# EAGLE board USB IMU Board (EAGLE 7.6.0)
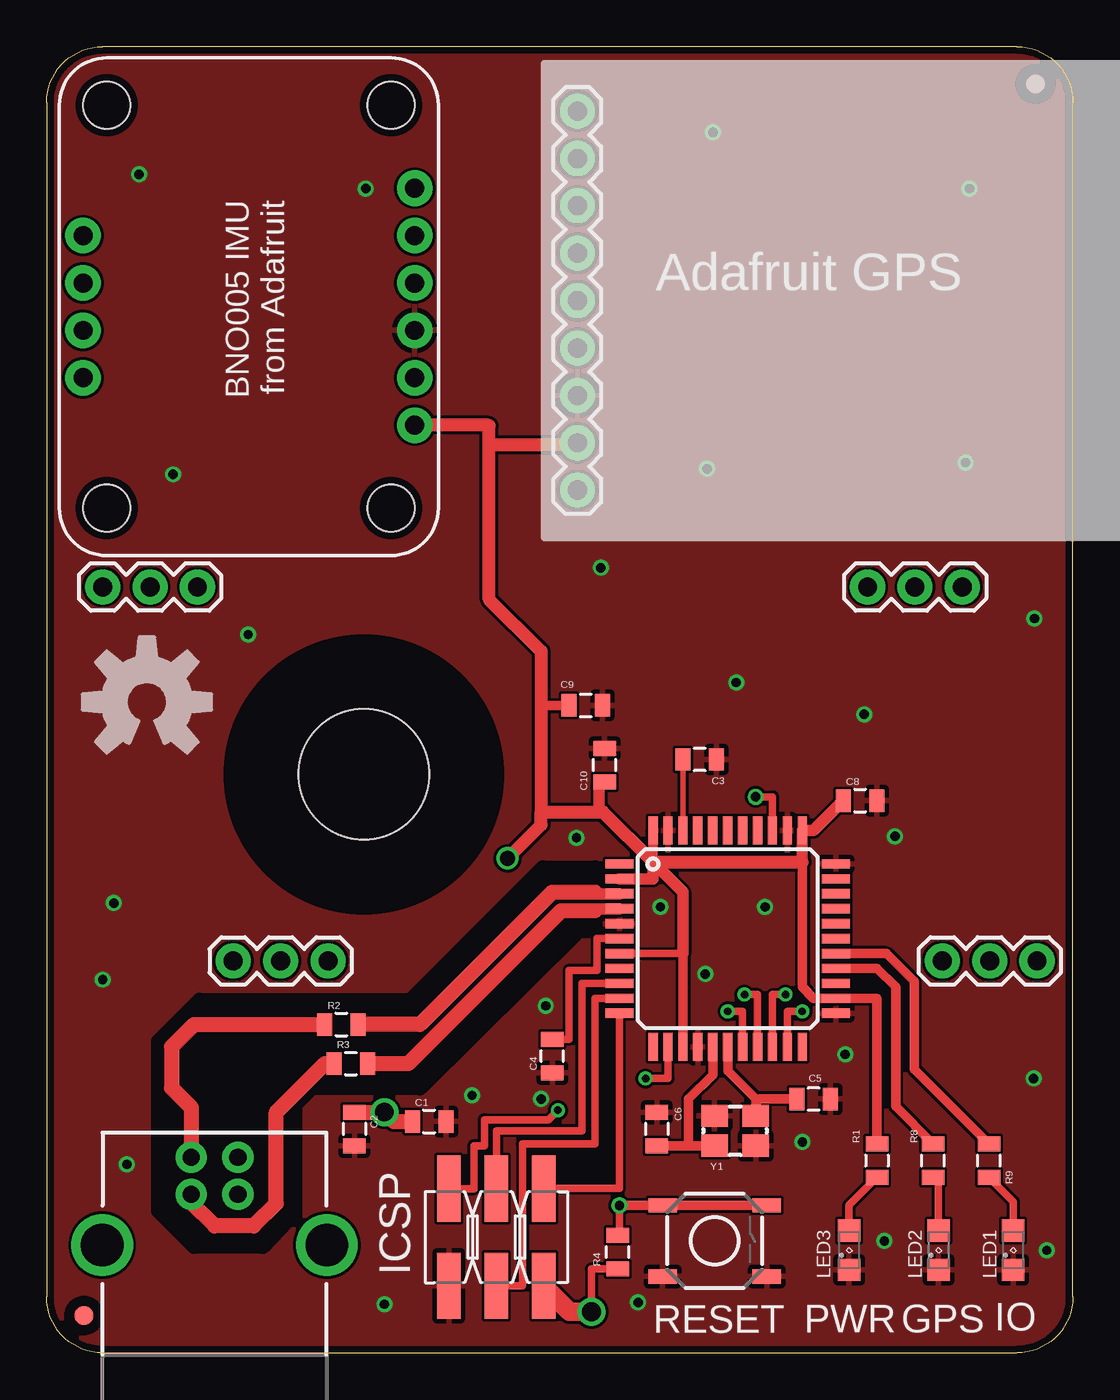
[diagram p0: board, top side]
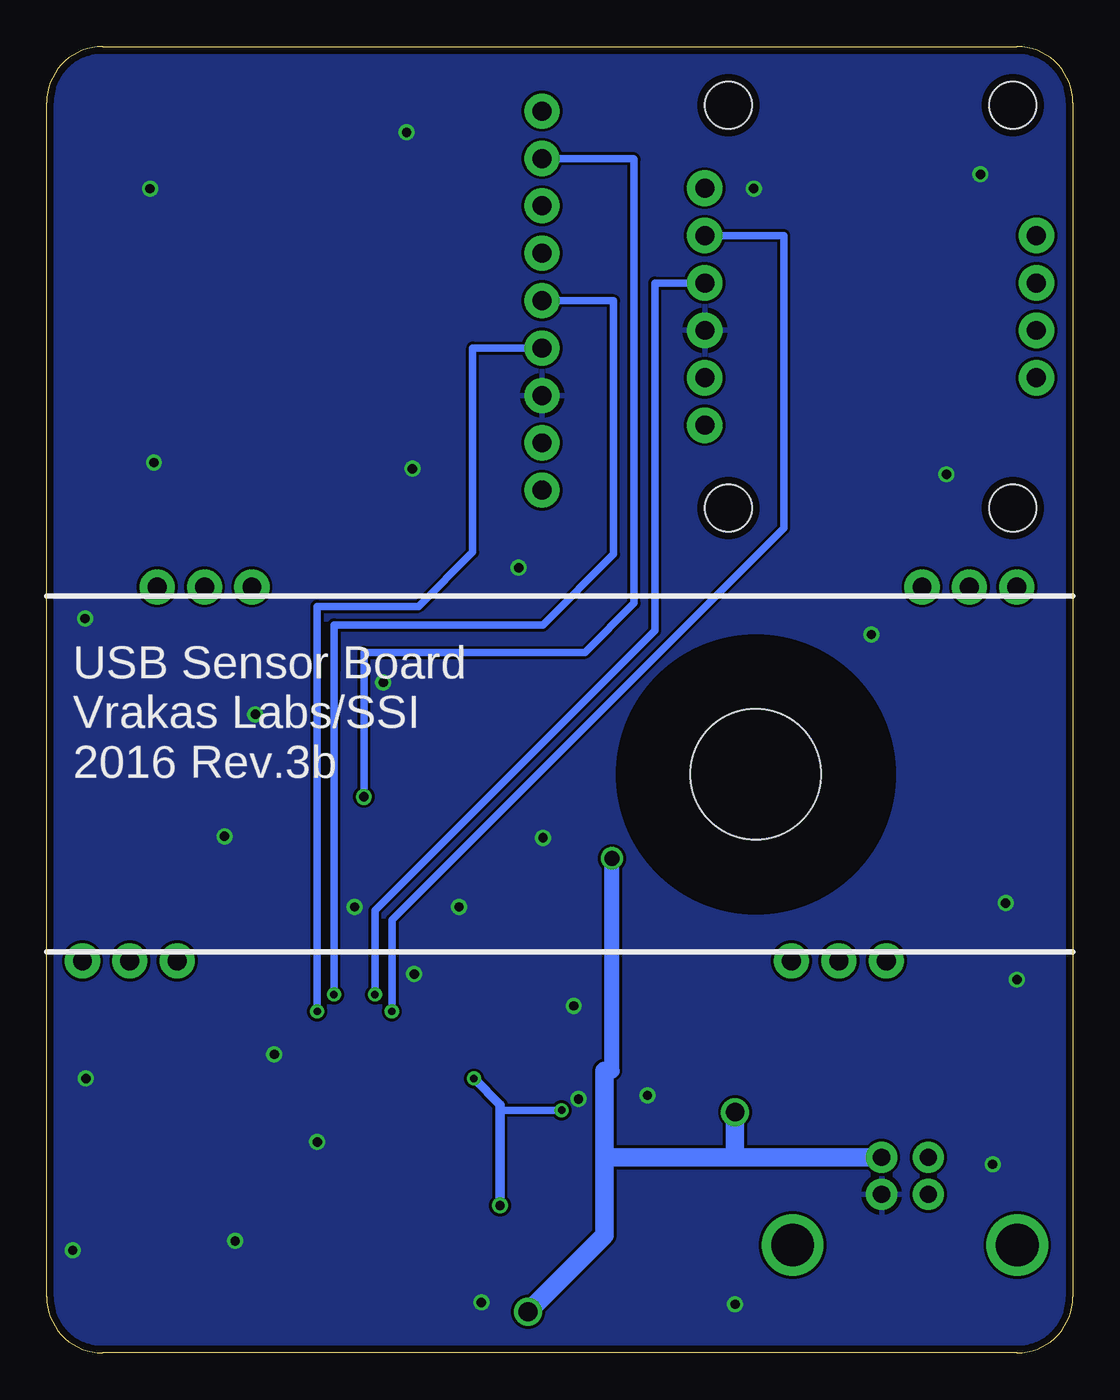
[diagram p1: board, bottom side, seen from below]

Size 55 x 70 mm. Coordinates in mm from the lower left corner, seen from the top.
Outline: 3,0 52,0 arc90 55,3 55,67 arc90 52,70 3,70 arc90 0,67 0,3 arc90 3,0
Copper layers (1*16): Top 0.0356mm / dielectric 1.5011mm / Bottom 0.0356mm
Design rules "LaenPCBOrder *": minimum track width 6mil, minimum drill 13mil, track to track 6mil, track to pad 6mil, pad to pad 6mil, via to via 6mil, smd to smd 6mil, copper to edge 15mil, drill to drill 6mil, minimum pad ring 7mil, minimum via ring 7mil, stop-mask expansion 3mil, vias tented up to drill 5mm, thermal gap 10mil
Holes 7 mm at 17,31
tKeepout: area 10,24 to 24,38
bKeepout: area 10,24 to 24,38
tRestrict: area 10,24 to 24,38; area 6,5.7 to 29.4,26
bRestrict: area 10,24 to 24,38

## Footprints (pad centres in the part's own frame; a part is rotated, then mirrored left to right if it is on the bottom)
0805 = smd 0.8 x 1.2: 1 -0.9,0; 2 0.9,0
M2X3_SMD = smd 1.27 x 3.56: 1 -2.54,-2.605; 2 -2.54,2.605; 3 0,-2.605; 4 0,2.605; 5 2.54,-2.605; 6 2.54,2.605
1X09 = drill 1.016 pad 1.88: 1 0,0; 2 2.54,0; 3 5.08,0; 4 7.62,0; 5 10.16,0; 6 12.7,0; 7 15.24,0; 8 17.78,0; 9 20.32,0
USB-B-PTH = drill 0.914 pad 1.676: D+ 0,1.25; D- 1.981,1.25; GND 0,-1.25; VBUS 1.981,-1.25 | drill 2.286: S1 -2.718,-6.02; S2 -2.718,6.02
1X03 = drill 1.016 pad 1.88: 1 0,0; 2 2.54,0; 3 5.08,0
SML0805 = smd 1.2 x 1.2: A 1.05,0; C -1.05,0
TACTILE-SWITCH-SMD = smd 1.524 x 0.762: 1 -2.794,1.905; 2 2.794,1.905; 3 -2.794,-1.905; 4 2.794,-1.905
TQFP44 = smd 1.5 x 0.5: 1 -5.8,4; 2 -5.8,3.2; 3 -5.8,2.4; 4 -5.8,1.6; 5 -5.8,0.8; 6 -5.8,0; 7 -5.8,-0.8; 8 -5.8,-1.6; 9 -5.8,-2.4; 10 -5.8,-3.2; 11 -5.8,-4; 23 5.8,-4; 24 5.8,-3.2; 25 5.8,-2.4; 26 5.8,-1.6; 27 5.8,-0.8; 28 5.8,0; 29 5.8,0.8; 30 5.8,1.6; 31 5.8,2.4; 32 5.8,3.2; 33 5.8,4 | smd 0.5 x 1.5: 12 -4,-5.8; 13 -3.2,-5.8; 14 -2.4,-5.8; 15 -1.6,-5.8; 16 -0.8,-5.8; 17 0,-5.8; 18 0.8,-5.8; 19 1.6,-5.8; 20 2.4,-5.8; 21 3.2,-5.8; 22 4,-5.8; 34 4,5.8; 35 3.2,5.8; 36 2.4,5.8; 37 1.6,5.8; 38 0.8,5.8; 39 0,5.8; 40 -0.8,5.8; 41 -1.6,5.8; 42 -2.4,5.8; 43 -3.2,5.8; 44 -4,5.8
BNO055-BREAKOUT = drill 1.016 pad 1.905: 3VO 1.27,17.145; ADR 19.05,9.525; GND 1.27,14.605; INT 19.05,12.065; PS0 19.05,17.145; PS1 19.05,14.605; RST 1.27,6.985; SCL 1.27,9.525; SDA 1.27,12.065; VIN 1.27,19.685 | hole 2.54: 2.54,2.54; 17.78,2.54; 2.54,24.13; 17.78,24.13
FIDUCIAL_1MM = smd 1 x 1: 1 0,0
CRYSTAL-SMD-5X3 = smd 1.4 x 1.2: 1 -1.1,-0.8; 2 1.1,-0.8; 3 1.1,0.8; 4 -1.1,0.8

## Placement (x,y rotation side)
C1  1uF  [0805]  20.5,12.4 0 top
C2  100nF  [0805]  16.5,12 270 top
C3  100nF  [0805]  35,31.8 180 top
C4  1uF  [0805]  27.1,15.9 90 top
C5  12pF  [0805]  41.1,13.6 180 top
C6  12pF  [0805]  32.7,12 270 top
C8  100nF  [0805]  43.6,29.6 0 top
C9  1uF  [0805]  28.9,34.7 0 top
C10  100nF  [0805]  29.9,31.5 90 top
FRAME2  FRAME-LETTERNO_PACKAGE  [DUMMY]  0,0 0 top
ICSP  CON_HEADER_PRG_AVR_ICSP-SMD  [M2X3_SMD]  24.1,6.2 180 top
J1  Adafruit GPS  [1X09]  28.45,66.55 270 top
JP1  USB-B  [USB-B-PTH]  9,8.5 90 top
JP3  [1X03]  3,41.05 0 top
JP4  [1X03]  44,41.05 0 top
JP5  [1X03]  10,21 0 top
JP7  [1X03]  48,21 0 top
LED1  GR  [SML0805]  51.8,5.5 90 top
LED2  RD  [SML0805]  47.8,5.5 90 top
LED3  BL  [SML0805]  43,5.5 90 top
R1  330  [0805]  44.5,10.3 270 top
R2  22  [0805]  15.8,17.6 0 top
R3  22  [0805]  16.3,15.5 0 top
R4  10K  [0805]  30.6,5.4 90 top
R8  330  [0805]  47.5,10.3 90 top
R9  330  [0805]  50.5,10.3 90 top
RESET  RST  [TACTILE-SWITCH-SMD]  35.8,6 0 top
U$1  ATMEGA32U4TQFP-44  [TQFP44]  36.5,22.2 0 top
U$4  BNO055-IMU  [BNO055-BREAKOUT]  21,69.4 180 top
U$7  FIDUCIAL  [FIDUCIAL_1MM]  53,68 0 top
U$8  FIDUCIAL  [FIDUCIAL_1MM]  2,2 0 top
U$9  [OSHW-LOGO-L]  5.37,34.88 0 top
Y1  16Mhz  [CRYSTAL-SMD-5X3]  36.9,11.9 0 top

## Library data of the parts
C1-C6 C8-C10 R4 = SparkFun-Passives
FRAME2 = SparkFun-Aesthetics; DESIGNER: Tim Vrakas; VERSION: 2
ICSP = dp_devices
J1 JP3-JP5 JP7 = SparkFun-Connectors
JP1 = SparkFun-Connectors; PROD_ID: CONN-08278
LED1-LED3 = led
R1-R3 R8 R9 = SparkFun-Resistors
RESET = SparkFun-Electromechanical; PROD_ID: SWCH-08247
U$1 = SparkFun-DigitalIC
U$4 = NASA Parts Lib
U$7 U$8 = adafruit
U$9 = SparkFun-Aesthetics
Y1 = crystal_3225

## Nets
DIN_N [USB1]: R2.2 U$1.3
DIN_P [USB1]: R3.2 U$1.4
GND: C1.2 C2.2 C3.1 C4.1 C5.1 C6.1 C8.2 C9.2 C10.2 ICSP.6 J1.7 JP1.GND LED1.C LED2.C LED3.C RESET.3 RESET.4 U$1.5 U$1.15 U$1.23 U$1.33 U$1.35 U$1.43 U$4.GND Y1.2 Y1.4
GPS_EN: J1.2 U$1.36
LED1: R9.2 U$1.27
LED2: R8.2 U$1.26
MIGO: J1.5 U$1.20
MISO: ICSP.1 U$1.11
MOGI: J1.6 U$1.21
MOSI: ICSP.4 U$1.10
N$1: C5.2 U$1.17 Y1.3
N$2: C6.2 U$1.16 Y1.1
N$3: C3.2 U$1.42
N$4: LED3.A R1.2
N$9: C4.2 U$1.6
N$12: LED1.A R9.1
N$13: LED2.A R8.1
RST: ICSP.5 R4.2 RESET.1 RESET.2 U$1.13
SCK: ICSP.3 U$1.9
SCL: U$1.18 U$4.SCL
SDA: U$1.19 U$4.SDA
USB_N: JP1.D- R2.1
USB_P: JP1.D+ R3.1
VCC: C1.1 C2.1 C8.1 C9.1 C10.1 ICSP.2 J1.8 JP1.VBUS R1.1 R4.1 U$1.2 U$1.7 U$1.14 U$1.24 U$1.34 U$1.44 U$4.VIN

## Tracks (layer width: path | path; a pad name or v marks a point on that pad's centre or on a via)
DIN_N
  Top 0.61: 29.4,24.7 29.5,24.6 U$1.3
  Top 0.813: 29.4,24.7 27.1,24.7 20,17.6 R2.2
DIN_P
  Top 0.61: 29.4,23.7 29.5,23.8 U$1.4
  Top 0.813: 29.4,23.7 27.58,23.7 19.38,15.5 R3.2
GND  (via drill 0.5)
  other vias: 17.1,62.4 4.95,63.16 35.71,65.41 6.77,47.08 49.46,62.39 26.75,18.59 3.6,24.1 3,20 26.5,13.6 28.4,27.6 18.1,2.6 44.9,6 22.8,13.8 4.3,10.1 53.6,5.5 40.5,11.3 31.7,2.7 45.47,27.68 52.9,14.7 42.8,16 35.3,20.3 32.9,23.9 49.25,47.71 35.4,47.38 29.7,42.08 43.82,34.22 10.8,38.5 52.94,39.35 36.96,35.92 38.5,23.9
  pour Top: 0,0 55,0 55,70 0,70
  pour Bottom: 0,0 55,0 55,70 0,70
GPS_EN  (via drill 0.5)
  Top 0.4: v38,29.8 38.9,29.8 U$1.36
  Bottom 0.4: v38,29.8 38,37.54 26.14,37.54 23.51,40.17 23.51,63.96 23.56,64.01 J1.2
LED1
  Top 0.5: R9.2 46.5,15.2 46.5,19.9 45,21.4 U$1.27
LED2
  Top 0.5: R8.2 45.5,13.2 45.5,19.6 44.5,20.6 U$1.26
MIGO  (via drill 0.4)
  Top 0.4: U$1.20 38.9,19.2 v39.6,19.2
  Bottom 0.4: v39.6,19.2 39.6,36.63 | 39.6,39 28.41,39 24.61,42.8 24.61,56.39 J1.5
  Bottom 0.406: 39.6,36.63 39.6,39 | J1.5
MISO
  Top 0.4: U$1.11 30.7,8.8 ICSP.1
MOGI  (via drill 0.4)
  Top 0.4: U$1.21 39.7,18.3 v40.5,18.3
  Bottom 0.4: v40.5,18.3 40.5,37.76 | 40.5,40 35.08,40 32.17,42.91 32.17,53.85 J1.6
  Bottom 0.406: 40.5,37.76 40.5,40 | 28.45,53.9 J1.6
MOSI
  Top 0.4: U$1.10 29.4,19 29.4,11.2 25.5,11.2 25.5,3.6 ICSP.4
N$1
  Top 0.5: U$1.17 36.5,15.1 38,13.6 38,13.4 | 38,13.4 Y1.3 | C5.2 38.2,13.6 38,13.4
N$2
  Top 0.5: U$1.16 35.7,14.9 34.4,13.6 34.4,11.1 | 34.4,11.1 Y1.1 | C6.2 34.4,11.1
N$3
  Top 0.3: U$1.42 C3.2
N$4
  Top 0.406: LED3.A 43,7.9 R1.2
N$9
  Top 0.4: U$1.6 29.5,22.2 29.5,20.5 28,20.5 28,16.8 C4.2
N$12
  Top 0.406: LED1.A 51.8,8.1 R9.1
N$13
  Top 0.406: LED2.A 47.8,9.1 R8.1
RST  (via drill 0.4, 0.5)
  Top 0.4: v32.1,14.7 33.3,14.7 U$1.13 | ICSP.5 22.3,8.8 22.9,8.8 22.9,11.1 23.46,11.1 23.46,12.5 26.9,12.5 v27.4,13 | R4.2 30.7,6.3 v30.7,7.9
  Top 0.5: v30.7,7.9 RESET.1 RESET.2
  Bottom 0.4: v27.4,13 30.7,13
  Bottom 0.5: v30.7,7.9 30.7,13 30.7,13.3 v32.1,14.7
SCK
  Top 0.4: U$1.9 28.7,19.8 28.7,11.9 24.1,11.9 ICSP.3
SCL  (via drill 0.4)
  Top 0.4: U$1.18 37.3,18.3 v36.5,18.3
  Bottom 0.4: U$4.SCL 15.5,59.88 15.5,44.2 36.5,23.2 v36.5,18.3
SDA  (via drill 0.4)
  Top 0.4: U$1.19 38.1,19.2 v37.4,19.2
  Bottom 0.4: v37.4,19.2 37.4,23.7 22.4,38.7 22.4,57.34 U$4.SDA
USB_N
  Top 0.813: JP1.D- 7.75,13.15 6.7,14.2 6.7,16.4 7.9,17.6 R2.1
USB_P
  Top 0.813: JP1.D+ 7.75,8.05 9,6.8 11.1,6.8 12.3,8 12.3,12.9 14.9,15.5 R3.1
VCC  (via drill 0.8, 1)
  Top 0.4: U$1.7 34.1,21.4 | 34.1,16.5 U$1.14 | R4.1 29.2,4.5 v29.2,2.2
  Top 0.5: U$1.44 32.5,26.3 32.8,26.2 | 40.5,26.3 40.5,19.6 41.1,19 U$1.24 44.5,19 R1.1 | 26.5,37.6 26.5,34.7 C9.1 | 34.1,21.4 34.1,16.5
  Top 0.6: 40.5,26.3 U$1.34
  Top 0.61: C8.1 41.1,28 U$1.34 | C10.1 29.6,30.3 29.6,29 | 34.1,21.4 34.1,24.7 32.5,26.3 32.5,25.4 U$1.2
  Top 0.7: 26.5,29 26.5,37.6 23.72,40.38 23.72,48.64 | 40.5,26.3 32.5,26.3 29.8,29 29.6,29 26.5,29 | 23.72,48.64 23.72,49.68 23.68,49.72 U$4.VIN | J1.8 28.32,48.64 23.72,48.64 | v24.7,26.5 26.5,28.3 26.5,29
  Top 0.8: C2.1 v18.1,12.9
  Top 0.813: v18.1,12.9 18.6,12.4 C1.1
  Top 1: v29.2,2.2 28.04,2.2 ICSP.2
  Bottom 0.8: 25.1,15.1 24.7,15.1 v24.7,26.5
  Bottom 1: 25.1,15.1 25.1,10.48 | 25.1,10.48 25.1,6.3 v29.2,2.2 | JP1.VBUS 18.1,10.48 | 18.1,10.48 25.1,10.48 | v18.1,12.9 18.1,10.48

## Text on the board
bPlace: USB Sensor Board / Vrakas Labs/SSI / 2016 Rev.3b
tNames: PWR | GPS | IO